# Altium PCB ife19_TS_BMS_LTC6811_TestCopy.PcbDoc
Units mm, origin at the board's own origin, x right, y up, seen from the top; angles counter-clockwise.
Board outline 99.9 x 32.5 mm, 2 copper layers (Top Layer, Bottom Layer); 90 components, 76 nets, 227 pads, 50 vias.
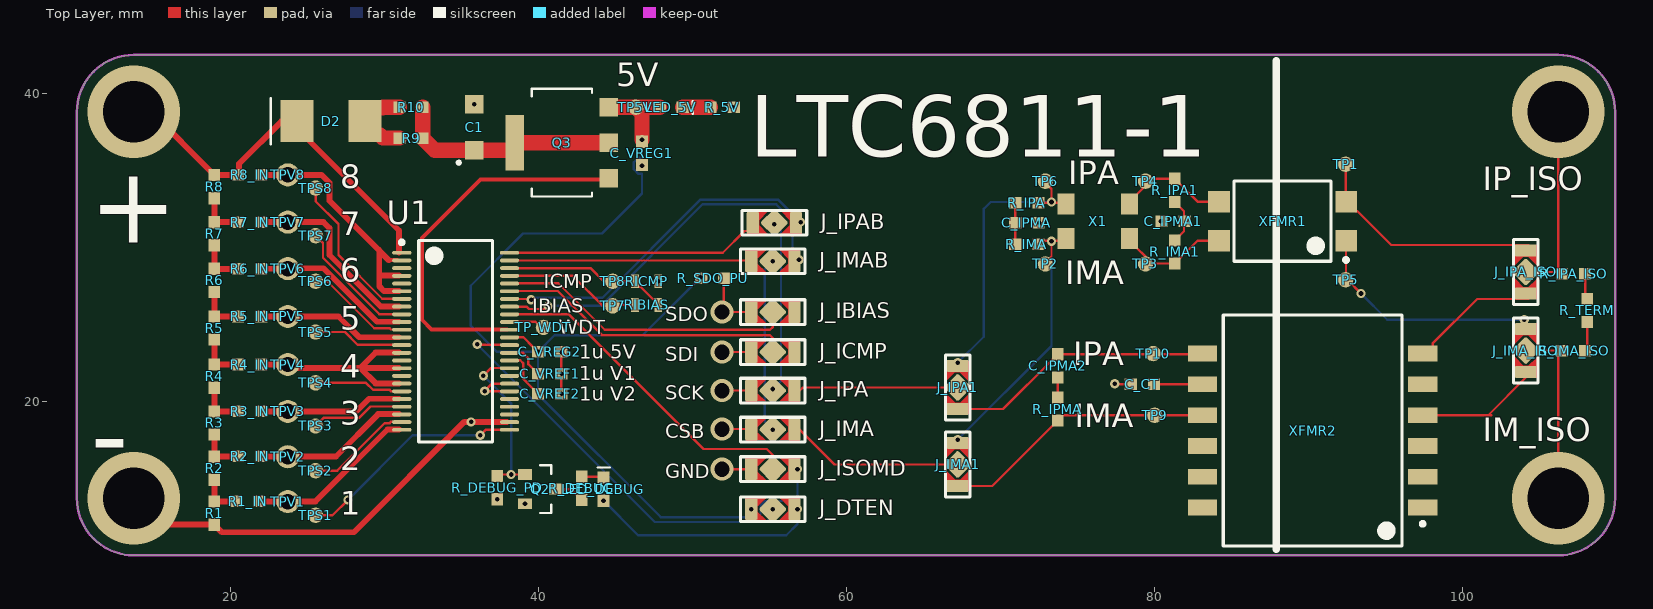
[diagram p0: Top Layer view]
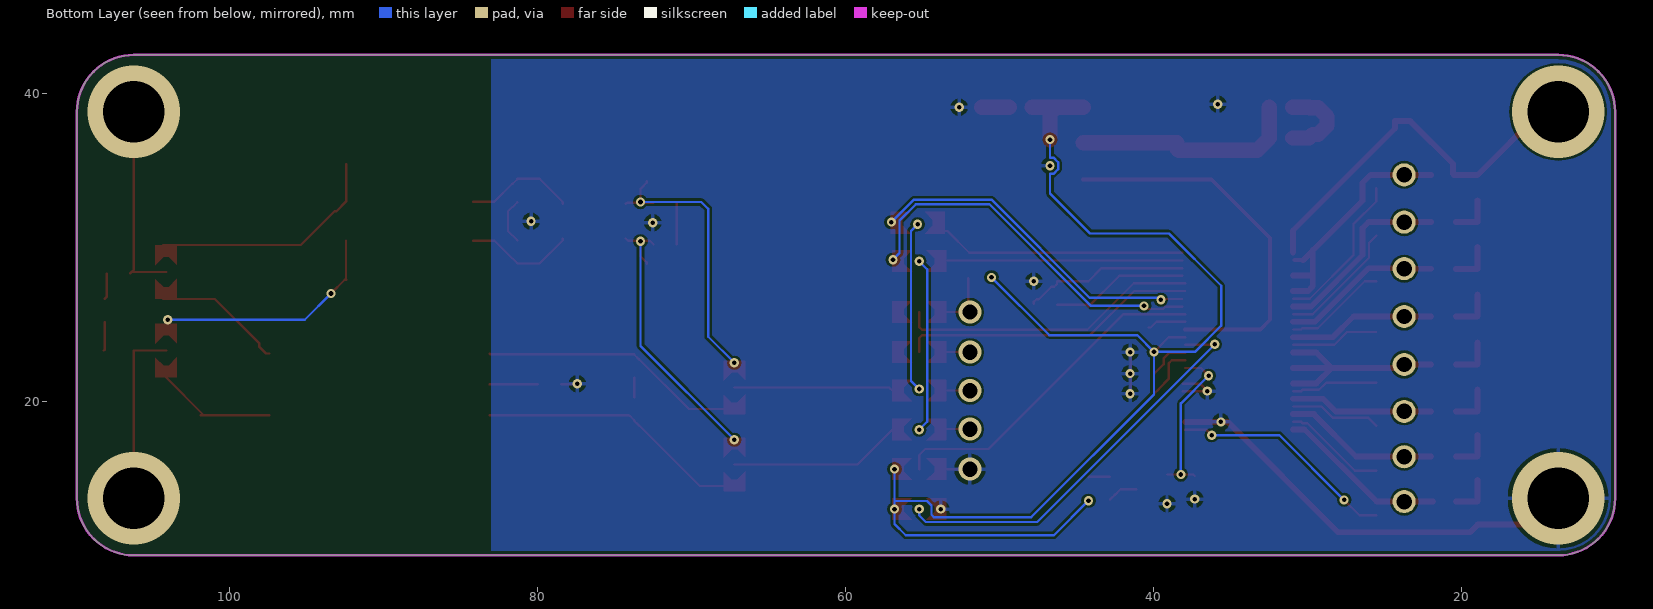
[diagram p1: Bottom Layer view, seen from below]
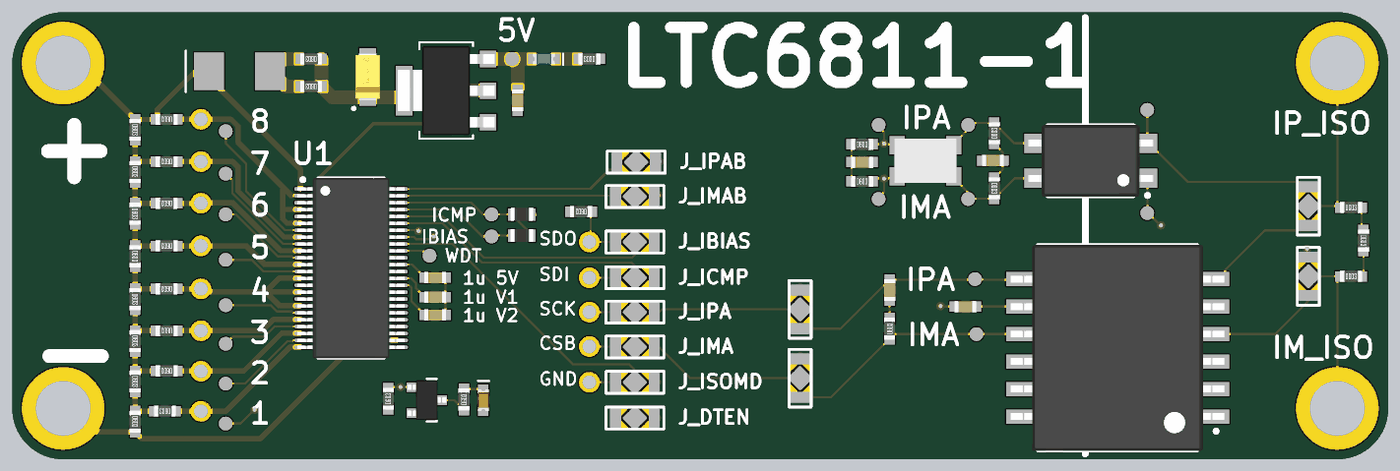
[diagram p2: 3D render of the assembled board from above, using the file's embedded part models]

## Layer stack, top to bottom
Top Solder: solder mask 0.0102, Solder Resist, Dk 3.5
Top Layer: signal copper 0.0356
Dielectric 1: dielectric 0.32, FR-4, Dk 4.8
Bottom Layer: signal copper 0.0356
Bottom Solder: solder mask 0.0102, Solder Resist, Dk 3.5

## Board outline
13.7,10 cw(c13.7,13.7) 10,13.7 10,38.8 cw(c13.7,38.8) 13.7,42.5 106.2,42.5 cw(c106.2,38.8) 109.9,38.8 109.9,13.7 cw(c106.2,13.7) 106.2,10

## Design rules (kind name [scope] priority, off if disabled: settings)
Clearance "Board outline" [OnLayer('Keep-Out Layer')] p1: gap=0.2 ignorepadtopadclearanceinfootprint=TRUE
Clearance "Schematic Clearance Constraint" [InNetClass('ISO')] p2: gap=0.813 ignorepadtopadclearanceinfootprint=TRUE
Clearance [All] p3: gap=0.152 ignorepadtopadclearanceinfootprint=TRUE
PolygonConnect [All] p1: connectstyle=Relief reliefconductorwidth=0.254 reliefentries=4 polygonreliefangle="90 Angle" airgapwidth=0.254
RoutingVias [All] p1: holewidth=0.44 width=0.6 viastyle="Through Hole" minholewidth=0.3 minwidth=0.6 maxholewidth=6.3 maxwidth=10
SolderMaskExpansion [All] p1: expansion=0.102
Width [All] p1: maxlimit=5 minlimit=0.152 preferedwidth=0.152
30 further rules are at their usual default settings.

## Classes and differential pairs
net class ISO: IMA_ISO1 IMA_ISO2 IPA_ISO1 IPA_ISO2 NetJ_IMA_ISO_3 NetJ_IPA_ISO_3 NetR_IMA_ISO_2 NetR_IPA_ISO_2

## Components (designator, comment, footprint, x,y, rotation, side; value= is the part's Value field where it differs from the comment)
C1 "CAP-1206" CAPCP3216X16N 35.8,37.8 r90 top
C_CT "CAP 10n" CAP-0603 79.2,21.1 r180 top
C_IPMA "CAP 10n" CAP-0603 71.7,31.6 r180 top
C_IPMA1 "CAP 10n" CAP-0603 81.2,31.7 r0 top
C_IPMA2 "CAP 15p" CAP-0603 73.7,22.3 r270 top
C_VREF1 "1u V1" CAP-0603 40.7,21.8 r180 top
C_VREF2 "1u V2" CAP-0603 40.7,20.5 r180 top
C_VREG1 "CAP 1u" CAP-0603 46.7,36.1 r90 top
C_VREG2 "1u 5V" CAP-0603 40.7,23.213 r180 top
D2 "?" SMB 26.5,38.2 r0 top
J_DTEN "DPDT Solder Jumper" "DPDT Solder" 55.2,13 r0 top
J_IBIAS "DPDT Solder Jumper" "DPDT Solder" 55.2,25.8 r0 top
J_ICMP "DPDT Solder Jumper" "DPDT Solder" 55.2,23.2 r0 top
J_IMA "DPDT Solder Jumper" "DPDT Solder" 55.2,18.166 r0 top
J_IMA1 "DPDT Solder Jumper" "DPDT Solder" 67.2,15.9 r90 top
J_IMA_ISO "DPDT Solder Jumper" "DPDT Solder" 104.1,23.3 r90 top
J_IMAB "DPDT Solder Jumper" "DPDT Solder" 55.2,29.1 r0 top
J_IPA "DPDT Solder Jumper" "DPDT Solder" 55.2,20.7 r0 top
J_IPA1 "DPDT Solder Jumper" "DPDT Solder" 67.2,20.9 r90 top
J_IPA_ISO "DPDT Solder Jumper" "DPDT Solder" 104.1,28.4 r90 top
J_IPAB "DPDT Solder Jumper" "DPDT Solder" 55.3,31.6 r0 top
J_ISOMD "DPDT Solder Jumper" "DPDT Solder" 55.2,15.6 r0 top
LED_5V "POWER" LEDBLUE-0603 48.6,39.1 r0 top
LED_DEBUG "DEBUG" LEDRED-0603 44.2,14.3 r90 top
Q2 "NMOS-SOT23" SOT23 40.1,14.3 r270 top
Q3 "NPN BJT SOT223-4" SOT223 41.5,36.8 r90 top
R1 "1K" RES-0603#1 18.927,12.74 r270 top
R1_IN "100" RES-0603#1 21.086,13.502 r180 top
R2 "1K" RES-0603#1 18.927,15.661 r270 top
R2_IN "100" RES-0603#1 21.213,16.423 r180 top
R3 "1K" RES-0603#1 18.927,18.594 r270 top
R3_IN "100" RES-0603#1 21.213,19.344 r180 top
R4 "1K" RES-0603#1 18.927,21.642 r270 top
R4_IN "100" RES-0603#1 21.213,22.392 r180 top
R5 "1K" RES-0603#1 18.927,24.761 r270 top
R5_IN "100" RES-0603#1 21.213,25.511 r180 top
R6 "1K" RES-0603#1 18.927,27.853 r270 top
R6_IN "100" RES-0603#1 21.213,28.615 r180 top
R7 "1K" RES-0603#1 18.927,30.889 r270 top
R7_IN "100" RES-0603#1 21.213,31.639 r180 top
R8 "1K" RES-0603#1 18.927,33.949 r270 top
R8_IN "100" RES-0603#1 21.213,34.711 r180 top
R9 "200" RES-0603#1 31.7,37.1 r180 top
R10 "200" RES-0603#1 31.7,39.1 r180 top
R_5V "500" RES-0603#1 51.9,39.1 r180 top
R_DEBUG "RES 500" RES-0603#1 42.8,14.35 r90 top
R_DEBUG_PD "100K" RES-0603#1 37.3,14.4 r90 top
R_IMA "60" RES-0603#1 71.7,30.2 r0 top
R_IMA1 "60" RES-0603#1 81.3,29.7 r270 top
R_IMA_ISO "22" RES-0603#1 107.2,23.3 r0 top
R_IPA "60" RES-0603#1 71.7,32.9 r0 top
R_IPA1 "60" RES-0603#1 81.3,33.7 r90 top
R_IPA_ISO "22" RES-0603#1 107.2,28.3 r0 top
R_IPMA "402" RES-0603#1 73.7,19.5 r90 top
R_SDO_PU "5K" RES-0603#1 51.3,28 r180 top
R_TERM "100" RES-0603#1 108.1,25.9 r270 top
RIBIAS "1K" RES-0603#2 47,26.262 r180 top value=?
RICMP "1K" RES-0603#2 47,27.8 r180 top value=?
TP1 "IP_ISO" Testpoint#1 92.4,35.4 r90 top
TP2 "IMA" Testpoint#1 72.9,28.923 r90 top
TP3 "IM_F" Testpoint#1 79.4,28.923 r90 top
TP4 "IP_F" Testpoint#1 79.4,34.3 r90 top
TP5 "IM_ISO" Testpoint#1 92.4,27.9 r90 top
TP5V "5V" Testpoint#1 46.3,39.1 r90 top
TP6 "IPA" Testpoint#1 72.9,34.3 r90 top
TP7 "IBIAS" Testpoint#1 44.8,26.2 r90 top
TP8 "ICMP" Testpoint#1 44.8,27.8 r90 top
TP9 "IMA" Testpoint#1 80,19.1 r0 top
TP10 "IPA" Testpoint#1 79.9,23.1 r0 top
TP_WDT "WDT" Testpoint#1 40.3,24.8 r90 top
TPS1 "" Testpoint#1 25.5,12.6 r90 top
TPS2 "" Testpoint#1 25.5,15.5 r90 top
TPS3 "" Testpoint#1 25.5,18.4 r180 top
TPS4 "" Testpoint#1 25.502,21.2 r180 top
TPS5 "" Testpoint#1 25.5,24.5 r180 top
TPS6 "" Testpoint#1 25.5,27.8 r180 top
TPS7 "" Testpoint#1 25.5,30.762 r180 top
TPS8 "" Testpoint#1 25.502,33.85 r180 top
TPV1 "1" Testpoint#2 23.7,13.49 r180 top
TPV2 "2" Testpoint#2 23.7,16.4 r180 top
TPV3 "3" Testpoint#2 23.7,19.344 r180 top
TPV4 "4" Testpoint#2 23.7,22.392 r180 top
TPV5 "5" Testpoint#2 23.7,25.511 r180 top
TPV6 "6" Testpoint#2 23.7,28.615 r180 top
TPV7 "7" Testpoint#2 23.7,31.639 r180 top
TPV8 "8" Testpoint#2 23.7,34.711 r180 top
U1 "LT-LTC6804-1-G-48" SSOP-48N 34.6,23.9 r0 top
X1 "SRF4532-101Y" SRF4532 76.3,31.7 r0 top
XFMR1 "ESMIT-4180/A" ISOXFMR_ESMIT4180 88.3,31.7 r180 top
XFMR2 "CTCM_XFMR-HM2112NL" HM2112NL 90.25,18.103 r180 top

## Footprints (in the part's own frame and the unit in brackets; to place one, negate y for a bottom-side part, rotate by r counter-clockwise, add the part's x,y. Pads: shape width x height; smd on the part's side, far side on the other; paste and mask are expansions set on the pad)
CAP-0603 [mm]
  rect 0.8x0.75 smd: 1(-0.75,0) 2(0.75,0)
  body extent -0.8,-0.4 0.8,0.42, height 0.81
CAPCP3216X16N [mm] "Chip Capacitor, 2-Leads, Body 3.20x1.60mm, IPC Medium Density"
  rect 1.2x1.2 smd: 1(-1.5,0) 2(1.5,0)
  silkscreen extent -2.4,0.9 -2.2,1.1, body extent -1.7,-0.9 1.7,0.9, height 1.7
"DPDT Solder" [mm]
  rrect20% 0.8x1.4 smd mask+0: 1(-1.4,0) 2(1.4,0)
  rrect20% 1.3x1.3 smd rot 45 mask+0: 3(0,0)
  Top Layer region: -1.75,0.7 -0.45,0.7 -1,0.15 -1,-0.175 -0.475,-0.7 -1.75,-0.7
  Top Layer region: 1.75,-0.7 0.45,-0.7 1,-0.15 1,0.175 0.475,0.7 1.75,0.7
  silkscreen extent -2.1,-0.8 2.1,0.8
HM2112NL [mm]
  rect 1.9x1.02 smd: 1(-7.15,5) 2(-7.15,3) 3(-7.15,1) 4(-7.15,-1) 5(-7.15,-3) 6(-7.15,-5) 7(7.15,-5) 8(7.15,-3) 9(7.15,-1) 10(7.15,1) 11(7.15,3) 12(7.15,5)
  silkscreen extent -7.28,-7.5 5.8,7.5, body extent -7.75,-7.5 7.75,7.5, height 3.45
ISOXFMR_ESMIT4180 [mm]
  rect 1.4x1.4 smd: 1(-4.125,1.27) 2(-4.125,-1.27) 3(4.125,-1.27) 4(4.125,1.27)
  silkscreen extent -4.25,-2.6 3.15,2.64, body extent -4.54,-2.6 4.54,2.6, height 3.5
LEDBLUE-0603 [mm]
  rect 0.8x0.75 smd: A(-0.75,0) K(0.75,0)
  silkscreen extent 1.4,-0.42 1.4,0.38, body extent -0.8,-0.4 0.8,0.4, height 0.53
LEDRED-0603 [mm]
  rect 0.8x0.75 smd: A(-0.75,0) K(0.75,0)
  silkscreen extent 1.4,-0.42 1.4,0.38, body extent -0.8,-0.4 0.8,0.4, height 0.53
RES-0603#1 [mm]
  rect 0.8x0.75 smd: 1(-0.75,0) 2(0.75,0)
  body extent -0.8,-0.4 0.8,0.4, height 0.44
RES-0603#2 [mm] "Chip Resistor, 2-Leads, Body 1.58x0.85mm, IPC Medium Density"
  rect 0.5x0.9 smd: 1(-0.75,0) 2(0.75,0)
  body extent -0.82,-0.48 0.82,0.48, height 0.5
SMB [mm]
  rect 2.159x2.743 smd: A(2.21,0) K(-2.21,0)
  silkscreen extent -3.9,-1.5 -3.9,1.5, body extent -2.79,-1.97 2.8,1.97, height 2.5
SOT23 [mm]
  rect 0.7x0.9 smd: 1(-0.95,-1) 2(0.95,-1) 3(0,1)
  silkscreen extent -1.55,0 1.55,0.71, body extent -1.45,-1.41 1.45,1.41, height 1.5
SOT223 [mm]
  rect 1.2x1.2 smd: 1(-2.3,-3.05) 2(0,-3.05) 3(2.3,-3.05)
  rect 3.6x1.2 smd: 4(0,3.05)
  silkscreen extent -3.5,-1.95 3.5,1.95, body extent -3.25,-3.52 3.25,3.5, height 1.8
SRF4532 [mm]
  rect 1.1x1.35 smd: 1(-2.05,-1.125) 2(2.05,-1.125) 3(2.05,1.125) 4(-2.05,1.125)
  body extent -2.25,-1.6 2.25,1.6, height 2.8
SSOP-48N [mm]
  oval 1.25x0.25 smd: 1(-3.5,5.75) 2(-3.5,5.25) 3(-3.5,4.75) 4(-3.5,4.25) 5(-3.5,3.75) 6(-3.5,3.25) 7(-3.5,2.75) 8(-3.5,2.25) 9(-3.5,1.75) 10(-3.5,1.25) 11(-3.5,0.75) 12(-3.5,0.25) 13(-3.5,-0.25) 14(-3.5,-0.75) 15(-3.5,-1.25) 16(-3.5,-1.75) 17(-3.5,-2.25) 18(-3.5,-2.75) 19(-3.5,-3.25) 20(-3.5,-3.75) 21(-3.5,-4.25) 22(-3.5,-4.75) 23(-3.5,-5.25) 24(-3.5,-5.75) 25(3.5,-5.75) 26(3.5,-5.25) 27(3.5,-4.75) 28(3.5,-4.25) 29(3.5,-3.75) 30(3.5,-3.25) 31(3.5,-2.75) 32(3.5,-2.25) 33(3.5,-1.75) 34(3.5,-1.25) 35(3.5,-0.75) 36(3.5,-0.25) 37(3.5,0.25) 38(3.5,0.75) 39(3.5,1.25) 40(3.5,1.75) 41(3.5,2.25) 42(3.5,2.75) 43(3.5,3.25) 44(3.5,3.75) 45(3.5,4.25) 46(3.5,4.75) 47(3.5,5.25) 48(3.5,5.75)
  silkscreen extent -3.62,-6.55 2.4,6.55, body extent -3.9,-6.55 3.9,6.55, height 2
Testpoint#1 [mm]
  round 1 smd: 1(0,0)
Testpoint#2 [mm]
  round 1.5 hole 1: 1(0,0)

## Part data
C_CT C_IPMA C_IPMA1 C_IPMA2 C_VREF1 C_VREF2 C_VREG1 C_VREG2: library part CAP-0603, "CAP-0603"
D2: library part DIODE-SMB
J_DTEN J_IBIAS J_ICMP J_IMA J_IMA1 J_IMA_ISO J_IMAB J_IPA J_IPA1 J_IPA_ISO J_IPAB J_ISOMD: library part "DPDT Solder"
LED_5V: library part LEDBLUE-0603
LED_DEBUG: library part LEDRED-0603
Q3: library part NPN_SOT223-4, "BCP54,115"
R1 R1_IN R2 R2_IN R3 R3_IN R4 R4_IN R5 R5_IN R6 R6_IN R7 R7_IN R8 R8_IN R9 R10 R_5V R_DEBUG R_DEBUG_PD R_IMA R_IMA1 R_IMA_ISO R_IPA R_IPA1 R_IPA_ISO R_IPMA R_SDO_PU R_TERM: library part RES-0603
RIBIAS RICMP: library part RES_0603, "RES SMD 0603", Package=0603, Company=IFE, Part=RES_0603
TP1 TP2 TP3 TP4 TP5 TP5V TP6 TP7 TP8 TP9 TP10 TP_WDT TPS1 TPS2 TPS3 TPS4 TPS5 TPS6 TPS7 TPS8 TPV1 TPV2 TPV3 TPV4 TPV5 TPV6 TPV7 TPV8: library part Testpoint
X1: library part CMC_SRF4532
XFMR1: library part ISOXFMR_ESMIT4180

## Via types
v1: diameter 0.6, hole 0.3, Top Layer to Bottom Layer, tented both sides, 41 vias
v2: diameter 1.5, hole 1, Top Layer to Bottom Layer, 5 vias
v3: diameter 6, hole 4, Top Layer to Bottom Layer, 4 vias

## Nets (pads, with @x,y where several pads share a name; then routed paths per layer and width w, separated by ;. In a path a pad name is that pad's centre, name@x,y a point inside that pad or via, vN(x,y) a via of type N, cw(c..) or ccw(c..) an arc to the next point about the centre after c; other vN are vias at no path point)
5V: C_VREG1.2 C_VREG2.2 J_DTEN.2 J_ISOMD.2 LED_5V.A LED_DEBUG.A Q3.3 R_SDO_PU.2 TP5V.1 U1.37 | length 87.3
  Top Layer w0.152: U1.37@37.921,24.166 38.996,24.166 39.626,23.536 39.626,23.511 39.925,23.213 v1(39.95,23.213) ; C_VREG1.2 v1(46.7,37)
  Top Layer w1: Q3.3 TP5V.1 ; v1(46.7,37) 46.7,38.7 TP5V.1 ; LED_5V.A TP5V.1
  Bottom Layer w0.152: v1(44.2,13.55) 46.45,11.3 56.073,11.3 56.8,12.027 v1(56.8,13) 56.8,13.529 ; v1(46.7,37) 46.7,35.829 46.481,35.829 46.171,35.519 46.171,35.081 46.481,34.771 46.7,34.771 46.7,33.5 44.1,30.9 38.977,30.9 35.584,27.507 35.584,24.916 37.287,23.213 v1(39.95,23.213) ; v1(50.5,28.05) 46.75,24.3 41.037,24.3 v1(39.95,23.213) ; v1(56.8,15.6) 56.8,13.529 ; v1(39.95,23.213) 39.95,20.45 47.929,12.471 54.24,12.471 54.4,12.631 54.4,13.24 54.688,13.529 56.8,13.529
CSB: J_IMA.1 | length 1.9
  Top Layer w0.152: v2(51.9,18.2) 53.766,18.2 J_IMA.1
DRIVE: Q3.1 U1.38 | length 24.8
  Top Layer w0.254: U1.38@37.921,24.666 33.034,24.666 32.4,25.3 32.4,30.6 36.2,34.4 Q3.1@44.55,34.4
GPIO1: U1.27
GPIO2: U1.28
GPIO3: U1.29
GPIO4: U1.32
IBIAS: RIBIAS.2 TP7.1 U1.45 | length 9
  Top Layer w0.152: U1.45 42.2,28.15 44.2,26.15 44.312,26.262 RIBIAS.2
ICMP: RIBIAS.1 RICMP.2 TP8.1 U1.46 | length 10.8
  Top Layer w0.152: U1.46 43.35,28.65 44.2,27.8 RICMP.2 46.25,27.615 46.424,27.441 46.609,27.441 47.414,26.636 47.576,26.636 47.75,26.462 RIBIAS.1@47.75,26.325
IM: J_IMA1.3 J_IMA.2 | length 11.5
  Top Layer w0.152: J_IMA.2 56.934,18.166 59.2,15.9 J_IMA1.3
IMA: J_IMAB.2 U1.41 | length 24.4
  Top Layer w0.152: U1.41 39.202,26.15 39.352,26 40.4,26 v1(40.6,26.2)
  Bottom Layer w0.152: v1(40.6,26.2) 44.031,26.2 50.626,32.795 55.413,32.795 56.471,31.737 56.471,29.629 v1(56.9,29.2)
IMA1: J_IMA1.2 R_IMA.2 TP2.1 X1.1 | length 19.2
  Top Layer w0.152: J_IMA1.2 v1(67.2,17.5) ; R_IMA.2 72.68,30.43 74.105,30.43 X1.1 ; TP2.1 72.9,29.027 73.3,29.427 v1(73.3,30.4)
  Bottom Layer w0.152: v1(67.2,17.5) 73.3,23.6 v1(73.3,30.4)
IMA2: J_IMA1.1 R_IPMA.1 TP9.1 XFMR2.9 | length 17.8
  Top Layer w0.152: J_IMA1.1 69.45,14.5 73.376,18.426 73.401,18.426 73.7,18.725 R_IPMA.1 73.7,18.775 73.999,19.074 74.024,19.074 74.053,19.103 XFMR2.9
IMA_ISO1: J_IMA_ISO.2 TP5.1 XFMR1.1 | length 15.7
  Top Layer w0.152: XFMR1.1 92.425,27.925 TP5.1 92.5,27.9 v1(93.4,27) ; v1(104,25.3) 104.085,25.214 104.085,25.069 J_IMA_ISO.2@104.1,25.054
  Bottom Layer w0.152: v1(93.4,27) 95.1,25.3 v1@104.2,25.3
IMA_ISO2: J_IMA_ISO.1 XFMR2.4 | length 7.9
  Top Layer w0.152: XFMR2.4 101.857,19.103 ; 101.657,19.103 J_IMA_ISO.1@104.1,21.546
IMB: J_IMAB.1 U1.47 | length 15.7
  Top Layer w0.152: U1.47 53.75,29.15 J_IMAB.1
IP: J_IPA1.3 J_IPA.2 | length 10.7
  Top Layer w0.152: J_IPA.2 56.95,20.7 57.15,20.9 J_IPA1.3
IPA: J_IPAB.2 U1.42 | length 22.2
  Top Layer w0.152: U1.42 39.45,26.65 v1(39.5,26.6)
  Bottom Layer w0.152: v1(39.5,26.6) 39.629,26.729 44.129,26.729 50.5,33.1 55.539,33.1 v1(57,31.639)
IPA1: J_IPA1.2 R_IPA.2 TP6.1 X1.4 | length 18.8
  Top Layer w0.152: J_IPA1.2 v1(67.2,22.5) ; R_IPA.2 74.175,32.9 X1.4 ; TP6.1 72.9,34.196 73.3,33.796 v1(73.3,32.95)
  Bottom Layer w0.152: v1(67.2,22.5) 68.9,24.2 68.9,32.5 69.35,32.95 v1(73.3,32.95)
IPA2: C_IPMA2.1 J_IPA1.1 TP10.1 XFMR2.7 | length 17.4
  Top Layer w0.152: J_IPA1.1 70.15,19.5 73.376,22.726 73.401,22.726 73.7,23.025 C_IPMA2.1 83.047,23.05 XFMR2.7
IPA_ISO1: J_IPA_ISO.2 TP1.1 XFMR1.2 | length 15.5
  Top Layer w0.152: TP1.1 92.4,32.995 XFMR1.2 93.049,32.346 93.166,32.346 95.358,30.154 J_IPA_ISO.2@104.3,30.154
IPA_ISO2: J_IPA_ISO.1 XFMR2.6 | length 8.5
  Top Layer w0.152: XFMR2.6 97.616,23.103 98.049,23.536 98.049,23.752 100.943,26.646 J_IPA_ISO.1@104.3,26.646
IPB: J_IPAB.1 U1.48 | length 16.7
  Top Layer w0.152: U1.48 51.95,29.65 53.364,31.064 53.576,31.064 53.9,31.388 J_IPAB.1
NEG1: C1.2 C_CT.2 C_IPMA1.1 C_IPMA.1 C_VREF1.1 C_VREF2.1 C_VREG1.1 C_VREG2.1 J_DTEN.1 J_ISOMD.1 Q2.2 R1.2 R_5V.1 R_DEBUG_PD.1 RICMP.1 U1.26 U1.30 U1.31 | length 37.4
  Top Layer w0.152: U1.30 38.084,20.666 v1(36.481,20.666) 36.965,21.15 U1.31 ; C_VREF2.1 C_VREF1.1 ; C_VREG2.1 C_VREF1.1 ; v1(41.5,21.8) C_VREF1.1 ; v2(51.9,15.6) J_ISOMD.1 ; C_IPMA.1 v1(72.5,31.6) ; v1(77.4,21.137) 77.437,21.1 C_CT.2 ; v1(80.4,31.7) C_IPMA1.1
  Top Layer w0.381: v3@13.8,13.7 13.8,13.4 15.21,11.99 R1.2 19.417,11.5 28,11.5 35.166,18.666 U1.26@37.921,18.666
  other v1: 53.8,13 39.1,13.35 37.3,13.65 35.6,18.666 41.5,20.5 41.5,23.2 47.75,27.8 46.7,35.3 52.6,39.1 35.8,39.3
  other v3: 13.7,13.7
NetC1_1: C1.1 Q3.2 Q3.4 R9.1 R10.1 | length 14.9
  Top Layer w1: R10.1 R9.1 33.25,36.3 C1.1 38.35,36.3 38.45,36.4 Q3.4 Q3.2
NetC_CT_1: C_CT.1 XFMR2.8 | length 3.2
  Top Layer w0.152: C_CT.1 83.097,21.1 XFMR2.8
NetC_IPMA1_2: C_IPMA1.2 R_IMA1.1 R_IPA1.1 | length 3
  Top Layer w0.152: R_IMA1.1 81.3,30.475 81.599,30.774 81.624,30.774 81.9,31.05 81.9,32.35 81.624,32.626 81.599,32.626 81.3,32.925 R_IPA1.1
NetC_IPMA2_2: C_IPMA2.2 R_IPMA.2 | length 1.3
  Top Layer w0.152: R_IPMA.2 C_IPMA2.2
NetC_IPMA_2: C_IPMA.2 R_IMA.1 R_IPA.1 | length 2.7
  Top Layer w0.152: R_IMA.1 C_IPMA.2 R_IPA.1
NetD2_A: D2.A R9.2 R10.2 | length 5.7
  Top Layer w1: R9.2 29.875,37.1 29.647,37.329 29.289,37.329 28.71,37.908 D2.A 28.71,38.492 29.289,39.071 29.847,39.071 29.875,39.1 R10.2
NetJ_DTEN_3: J_DTEN.3 U1.36 | length 26.5
  Top Layer w0.152: v1(36,23.7) 36.034,23.666 U1.36@37.921,23.666
  Bottom Layer w0.152: v1(36,23.7) 47.533,12.167 54.767,12.167 55.2,12.6 v1(55.2,13)
NetJ_IMA_3: J_IMA.3 J_IMAB.3 | length 11.4
  Top Layer w0.152: v1(55.2,18.154) J_IMA.3
  Bottom Layer w0.152: v1(55.2,18.154) 54.671,18.682 54.671,28.571 v1(55.2,29.1)
NetJ_IMA_ISO_3: J_IMA_ISO.3 R_IMA_ISO.1 | length 11.7
  Top Layer w0.152: J_IMA_ISO.3 105.582,23.3 ; 105.607,23.3 106.2,23.3 v3(106.2,13.7)
NetJ_IPA_3: J_IPA.3 J_IPAB.3 | length 11.2
  Top Layer w0.152: v1(55.3,31.5) J_IPAB.3
  Bottom Layer w0.152: v1(55.2,20.8) 55.729,21.329 55.729,31.071 v1(55.3,31.5)
NetJ_IPA_ISO_3: J_IPA_ISO.3 R_IPA_ISO.1 | length 12.9
  Top Layer w0.152: J_IPA_ISO.3 R_IPA_ISO.1@106.35,28.4 ; v3(106.2,38.8) 106.2,28.55 R_IPA_ISO.1@106.35,28.4 ; R_IPA_ISO.1 R_IPA_ISO.1@106.35,28.4
NetJ_ISOMD_3: J_ISOMD.3 U1.40 | length 22
  Top Layer w0.152: U1.40@37.921,25.666 41.934,25.666 50.7,16.9 54.8,16.9 55.2,16.5 J_ISOMD.3
NetLED_5V_K: LED_5V.K R_5V.2 | length 1.8
  Top Layer w1: LED_5V.K R_5V.2
NetLED_DEBUG_K: LED_DEBUG.K R_DEBUG.2 | length 1.4
  Top Layer w0.152: R_DEBUG.2 44.15,15.1 LED_DEBUG.K
NetQ2_1: Q2.1 R_DEBUG_PD.2 U1.33 | length 10.7
  Top Layer w0.152: v1(36.4,21.666) 36.9,22.166 U1.33@37.921,22.166 ; R_DEBUG_PD.2 37.4,15.25 v1(38.2,15.25) Q2.1
  Bottom Layer w0.152: v1(36.4,21.666) 38.2,19.866 v1(38.2,15.25)
NetQ2_3: Q2.3 R_DEBUG.1 | length 2
  Top Layer w0.152: Q2.3 42.1,14.3 42.476,13.924 42.501,13.924 42.8,13.625 R_DEBUG.1
NetR1_1: R1.1 R1_IN.2 R2.2 | length 2.8
  Top Layer w0.381: R2.2 R1.1 20.324,13.49 R1_IN.2
NetR2_1: R2.1 R2_IN.2 R3.2 | length 2.8
  Top Layer w0.381: R3.2@18.927,17.832 R2.1 20.324,16.411 R2_IN.2@20.336,16.423
NetR3_1: R3.1 R3_IN.2 R4.2 | length 2.8
  Top Layer w0.381: R4.2@18.927,20.765 R3.1 20.324,19.344 R3_IN.2@20.336,19.356
NetR4_1: R4.1 R4_IN.2 R5.2 | length 2.8
  Top Layer w0.381: R5.2@18.927,23.813 R4.1 20.324,22.392 R4_IN.2@20.336,22.404
NetR5_1: R5.1 R5_IN.2 R6.2 | length 2.8
  Top Layer w0.381: R6.2@18.927,26.932 R5.1 20.324,25.511 R5_IN.2@20.336,25.523
NetR6_1: R6.1 R6_IN.2 R7.2 | length 2.8
  Top Layer w0.381: R7.2@18.927,30.024 R6.1 20.324,28.603 R6_IN.2@20.336,28.615
NetR7_1: R7.1 R7_IN.2 R8.2 | length 2.8
  Top Layer w0.381: R8.2@18.927,33.06 R7.1 20.324,31.639 R7_IN.2@20.336,31.651
NetR_IMA1_2: R_IMA1.2 TP3.1 X1.2 XFMR1.4 | length 7.2
  Top Layer w0.152: X1.2 78.35,30.45 79.85,28.95 R_IMA1.2 81.3,28.975 81.599,29.274 81.624,29.274 82.78,30.43 XFMR1.4
NetR_IMA_ISO_2: R_IMA_ISO.2 R_TERM.2 | length 1.9
  Top Layer w0.152: R_TERM.2 108.1,23.35 R_IMA_ISO.2@108.15,23.3
NetR_IPA1_2: R_IPA1.2 TP4.1 X1.3 XFMR1.3 | length 7.2
  Top Layer w0.152: X1.3 78.35,32.95 79.85,34.45 R_IPA1.2 81.3,34.425 81.599,34.126 81.624,34.126 82.78,32.97 XFMR1.3
NetR_IPA_ISO_2: R_IPA_ISO.2 R_TERM.1 | length 1.7
  Top Layer w0.152: R_IPA_ISO.2 107.95,26.8 R_TERM.1
NetTP_WDT_1: TP_WDT.1 U1.39 | length 2.5
  Top Layer w0.152: U1.39@37.921,25.166 39.787,25.166 40.153,24.8 TP_WDT.1
NetTPS1_1: TPS1.1 U1.25 | length 14.7
  Top Layer w0.152: TPS1.1 26.6,12.6 v1(27.6,13.6) ; v1(36.2,17.8) 36.566,18.166 U1.25@37.921,18.166
  Bottom Layer w0.152: v1(27.6,13.6) 31.8,17.8 v1(36.2,17.8)
NetTPS2_1: TPS2.1 U1.23 | length 6.7
  Top Layer w0.152: TPS2.1 26.907,15.5 29.992,18.585 30.314,18.585 30.395,18.666 U1.23@30.921,18.666
NetTPS3_1: TPS3.1 U1.21 | length 5.9
  Top Layer w0.152: TPS3.1 26.025,18.925 28.318,18.925 29.059,19.666 U1.21@30.921,19.666
NetTPS4_1: TPS4.1 U1.19 | length 5.6
  Top Layer w0.152: TPS4.1 28.773,21.2 29.226,20.747 30.314,20.747 30.395,20.666 U1.19@30.921,20.666
NetTPS5_1: TPS5.1 U1.13 | length 5.8
  Top Layer w0.152: TPS5.1 27.407,24.5 28.241,23.666 U1.13@30.921,23.666
NetTPS6_1: TPS6.1 U1.11 | length 6.7
  Top Layer w0.152: TPS6.1 26.262,27.8 29.315,24.747 30.314,24.747 30.395,24.666 U1.11@30.921,24.666
NetTPS7_1: TPS7.1 U1.9 | length 8.1
  Top Layer w0.152: TPS7.1 25.981,30.282 25.981,29.326 29.641,25.666 U1.9@30.921,25.666
NetTPS8_1: TPS8.1 U1.7 | length 10.1
  Top Layer w0.152: TPS8.1 25.502,32.998 26.991,31.509 26.991,29.502 29.827,26.666 U1.7@30.921,26.666
POS8: D2.K R8.1 R8_IN.2 U1.1 | length 25.6
  Top Layer w0.381: v3@13.6,38.7 14.526,38.7 14.726,38.9 R8.1 20.451,34.699 R8_IN.2 20.534,34.782 20.534,35.434 23.3,38.2 D2.K 24.29,37.721 30.921,31.09 U1.1@30.921,29.666
  other v3: 13.7,38.8
SCK: J_IPA.1 | length 1.9
  Top Layer w0.152: v2(51.9,20.7) J_IPA.1
SDI: J_ICMP.1 | length 1.9
  Top Layer w0.152: v2(51.9,23.2) J_ICMP.1
SDI_NC: J_ICMP.3 U1.43 | length 19.4
  Top Layer w0.152: U1.43@37.921,27.166 41.234,27.166 44.1,24.3 55,24.3 55.2,24.1 J_ICMP.3
SDO: J_IBIAS.1 R_SDO_PU.1 | length 4.9
  Top Layer w0.152: v2@51.9,26.35 v2@51.9,26.325 ; R_SDO_PU.1@52,28 v2@52,26.225 ; v2@52.224,26.026 52.199,26.026 v2@52,26.225 ; J_IBIAS.1 v2(51.9,25.8) v2@51.9,26.2 ; v2@51.9,26.2 52,26.1 v2@52,26.225 ; v2@51.9,26.2 v2@51.9,26.325 ; v2@51.9,26.325 v2@52,26.225
SDO_NC: J_IBIAS.3 U1.44 | length 19.6
  Top Layer w0.152: U1.44@37.921,27.666 41.268,27.666 44.284,24.65 55.014,24.65 55.2,24.836 J_IBIAS.3
V1: R1_IN.1 TPV1.1 U1.24 | length 11
  Top Layer w0.381: R1_IN.1 25.502,13.502 30.166,18.166 U1.24@30.921,18.166
V2: R2_IN.1 TPV2.1 U1.22 | length 10.1
  Top Layer w0.381: R2_IN.1 26.823,16.423 29.566,19.166 U1.22@30.921,19.166
V3: R3_IN.1 TPV3.1 U1.20 | length 9.3
  Top Layer w0.381: R3_IN.1 TPV3.1 28.144,19.344 28.966,20.166 U1.20@30.921,20.166
V4: R4_IN.1 TPV4.1 U1.14 U1.16 U1.18 | length 14.9
  Top Layer w0.381: R4_IN.1 TPV4.1 23.926,22.166 28.4,22.166 ; U1.18@30.921,21.166 29.4,21.166 28.4,22.166 ; U1.16@30.921,22.166 28.4,22.166 ; U1.14@30.921,23.166 29.4,23.166 28.4,22.166
V5: R5_IN.1 TPV5.1 U1.12 | length 9.5
  Top Layer w0.381: R5_IN.1 TPV5.1 26.989,25.511 28.334,24.166 U1.12@30.921,24.166
V6: R6_IN.1 TPV6.1 U1.10 | length 10.4
  Top Layer w0.381: R6_IN.1 TPV6.1 23.728,28.643 26.012,28.643 29.489,25.166 U1.10@30.921,25.166
V7: R7_IN.1 TPV7.1 U1.8 | length 12.3
  Top Layer w0.381: R7_IN.1 TPV7.1 26.011,31.639 26.4,31.25 26.4,29.5 29.734,26.166 U1.8@30.921,26.166
V8: R8_IN.1 TPV8.1 U1.2 U1.4 U1.6 | length 16.9
  Top Layer w0.254: 30.249,29.166 U1.2@30.821,29.166
  Top Layer w0.381: R8_IN.1 TPV8.1 25.889,34.711 26.4,34.2 26.4,33.025 29.634,29.791 ; 29.634,29.825 29.634,29.791 ; 30.249,29.166 30.259,29.166 29.634,29.791 ; U1.6@30.921,27.166 29.934,27.166 29.634,27.466 29.634,28.2 ; U1.4@30.921,28.166 29.668,28.166 29.634,28.2 ; 29.634,28.2 29.634,29.791
VREF1: C_VREF1.2 U1.35 | length 2.8
  Top Layer w0.152: U1.35@37.921,23.166 38.934,23.166 39.321,22.779 39.321,22.404 39.925,21.8 C_VREF1.2
VREF2: C_VREF2.2 U1.34 | length 3.5
  Top Layer w0.152: U1.34@37.921,22.666 38.8,22.666 39,22.466 39,21.45 39.626,20.824 39.626,20.799 39.925,20.5 C_VREF2.2
pads on no net: J_IBIAS.2 J_ICMP.2 U1.3 U1.5 U1.15 U1.17 XFMR2.1 XFMR2.2 XFMR2.3 XFMR2.5 XFMR2.10 XFMR2.11 XFMR2.12

## Polygon pours and split planes (outlines as drawn)
NEG1 on Bottom Layer "Bottom Layer-NEG1" (solid, remove dead copper, pour order 0): 10,42.5 83,42.5 83,10 10,10

## Keep-outs
Keep-Out Layer:
  lines w0.152: 10,13.7 ccw(c13.7,13.7) 13.7,10 106.2,10 ccw(c106.2,13.7) 109.9,13.7 109.9,33.1 109.9,38.8 ccw(c106.2,38.8) 106.2,42.5 13.7,42.5 ccw(c13.7,38.8) 10,38.8 10,13.7

## Silkscreen, mask and mechanical layers (free items; w line width, h text height)
Top Overlay:
  lines w0.5: 87.9,10.4 87.9,42.1
  text "LTC6811-1" at 53.7,35.9 h4
  text "+" at 10.8,30.3 h5
  text "SDO" at 48.2,25.2 h0.91
  text "SDI" at 48.2,22.6 h0.91
  text "SCK" at 48.2,20.1 h0.91
  text "CSB" at 48.2,17.6 h0.91
  text "-" at 10.9,15.4 h5
  text "GND" at 48.2,15 h0.91

## Dimensions
13.7,42.5 to 13.7,10 on Measurements (Mech8)
10,38.8 to 109.9,33.1 on Measurements (Mech8)